# Altium PCB 75200_cap.PcbDoc
Units mm, origin at the board's own origin, x right, y up, seen from the top; angles counter-clockwise.
Board outline 92 x 60 mm, 4 copper layers (Top Layer, Signal Layer 1, Signal Layer 2, Bottom Layer), stack 0.463 mm thick; 12 components, 2 nets, 31 pads, 700 vias.
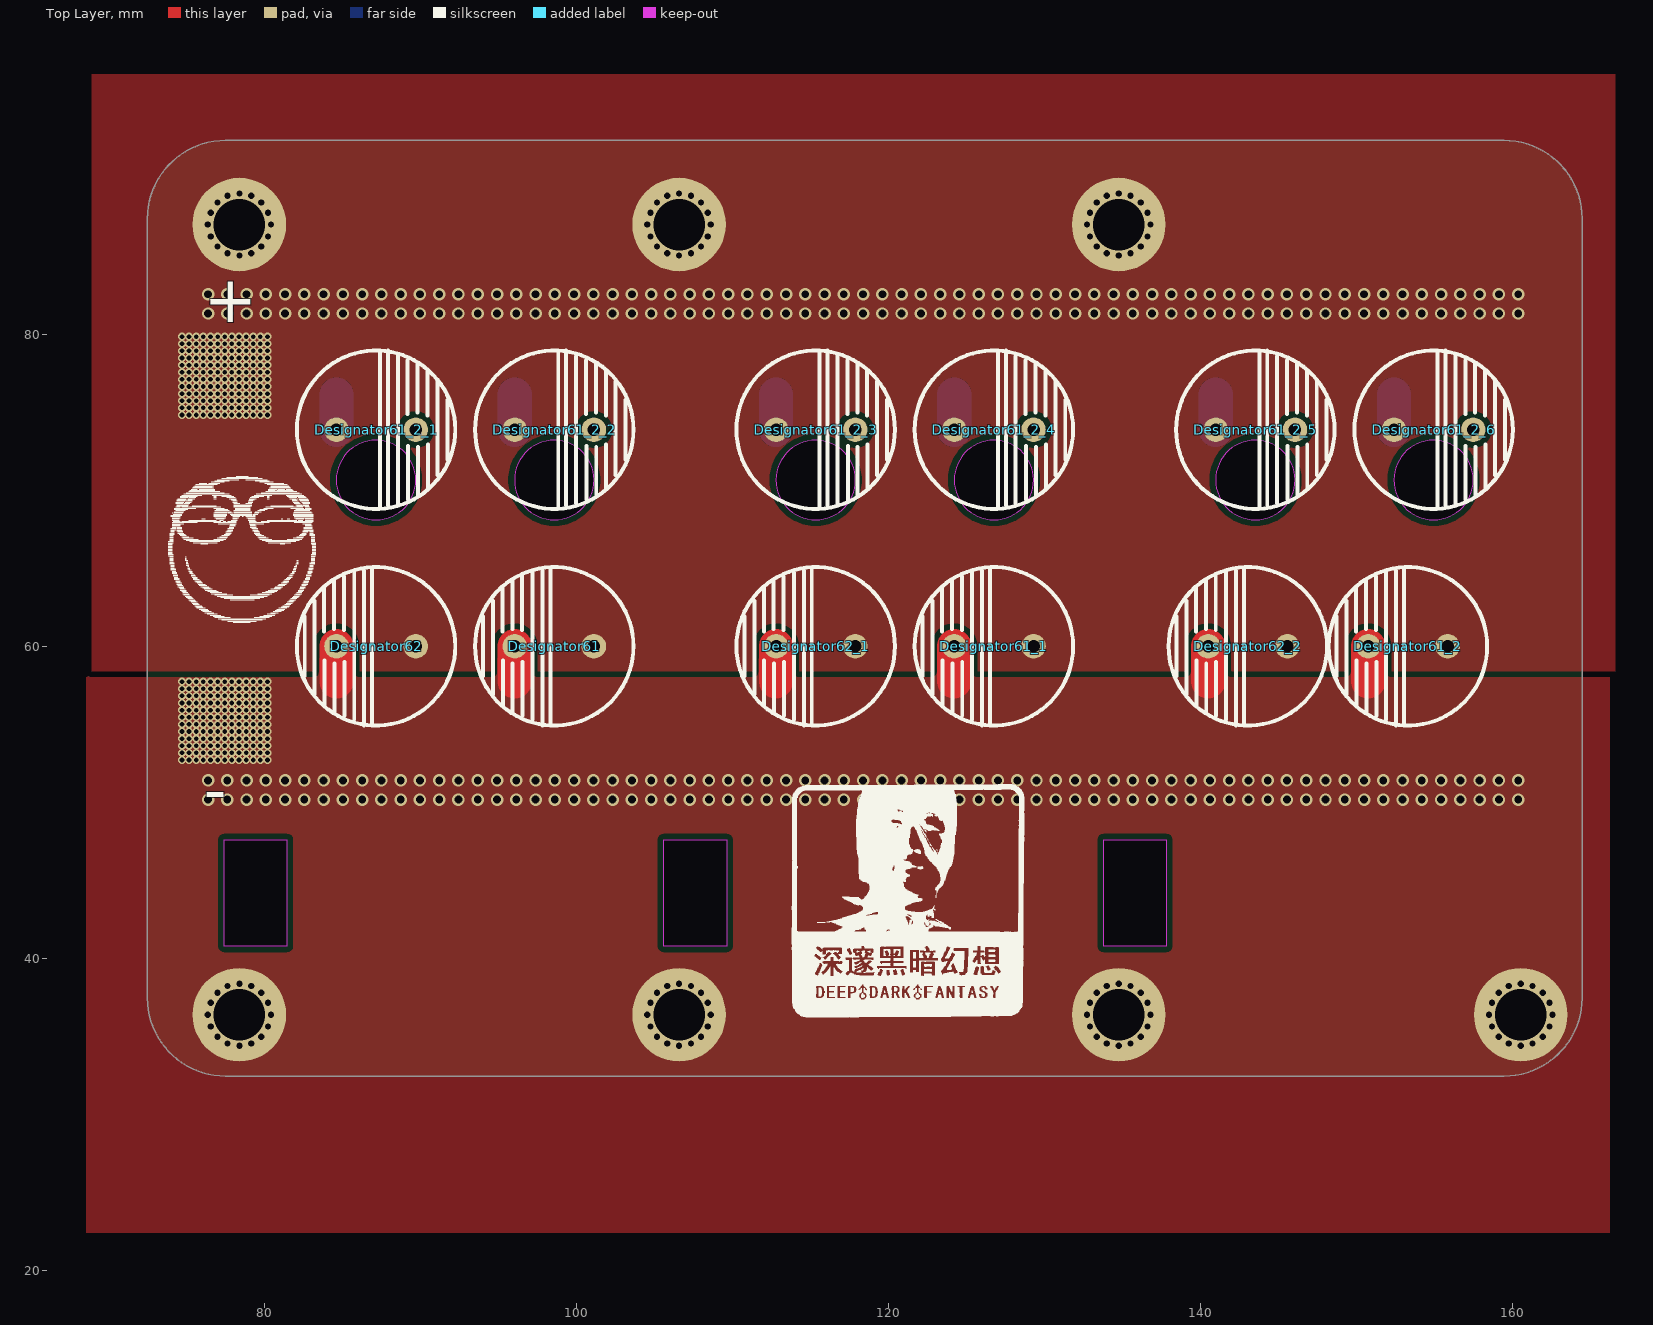
[diagram p0: Top Layer view]
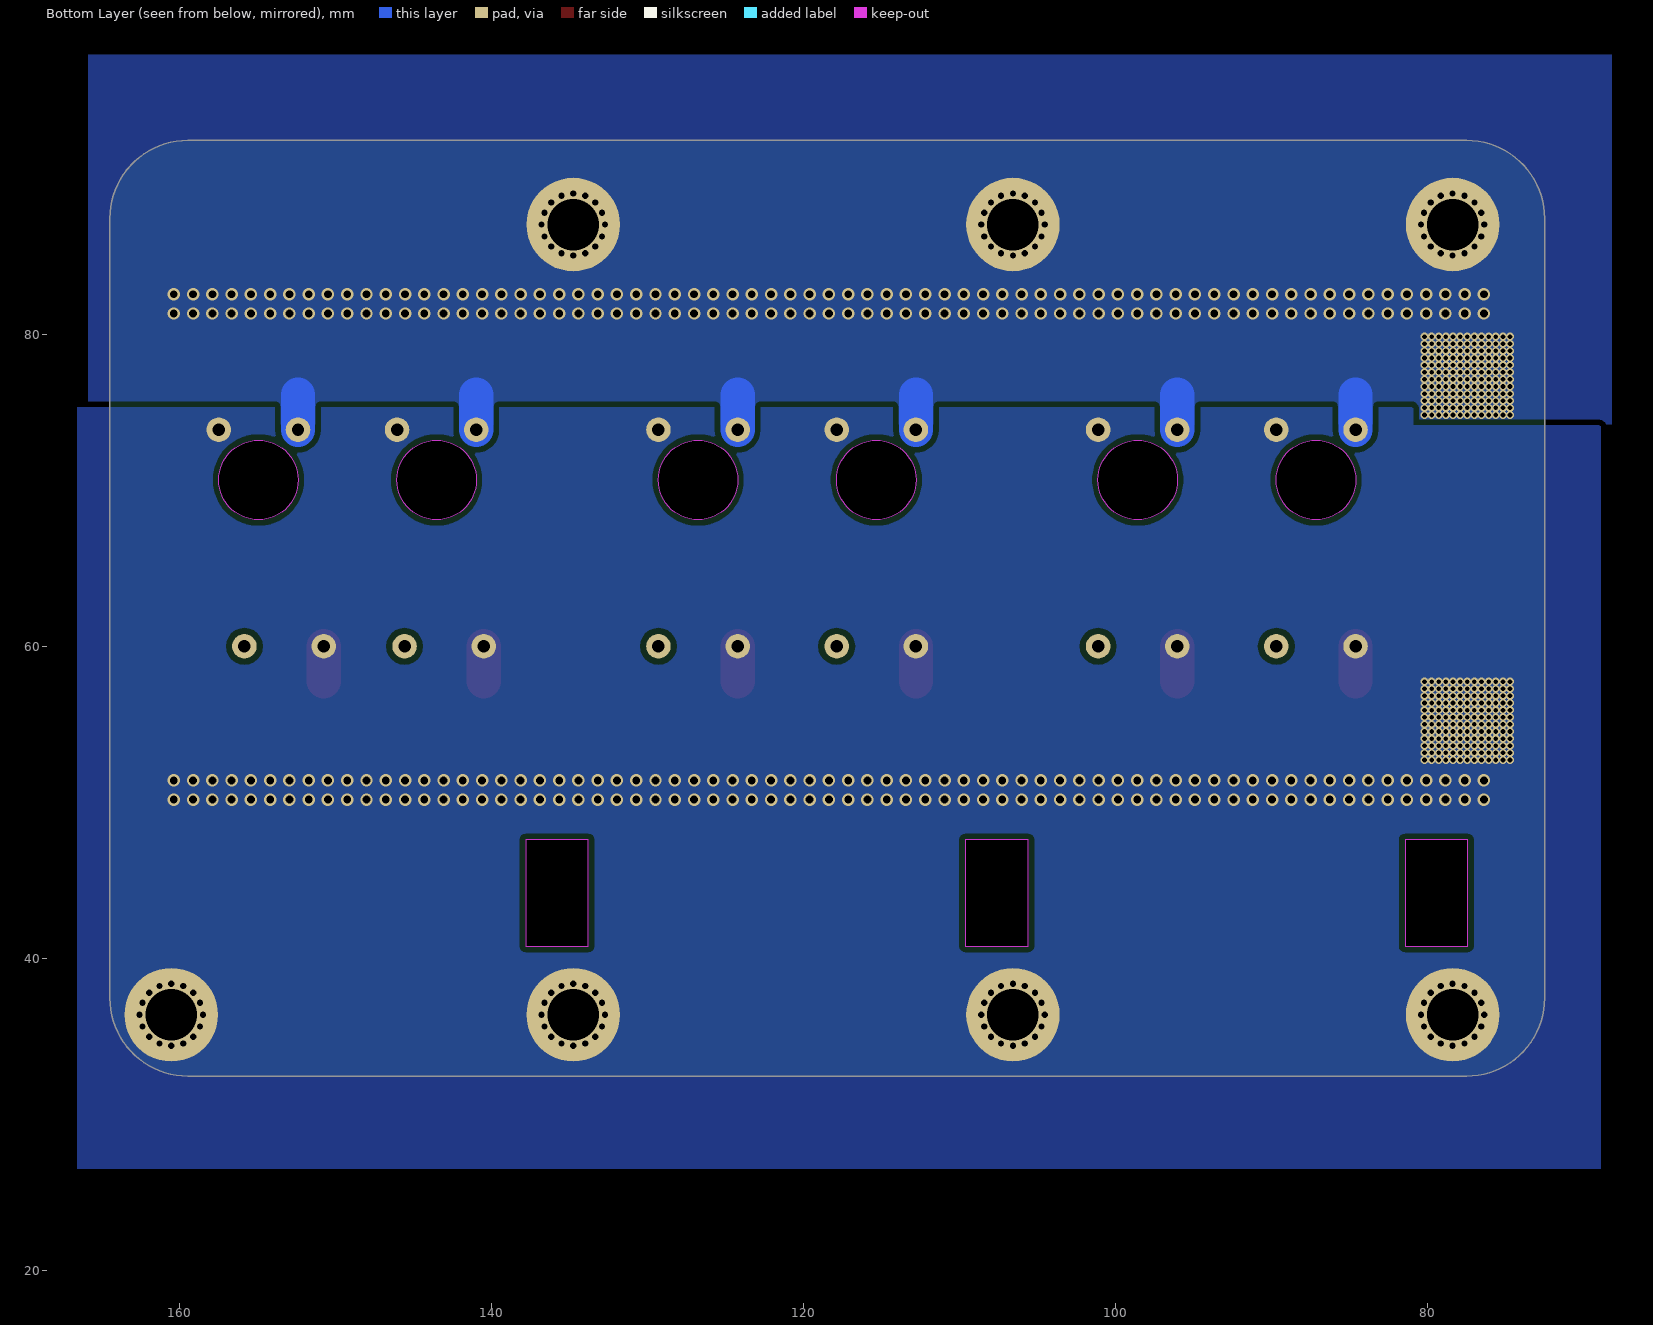
[diagram p1: Bottom Layer view, seen from below]
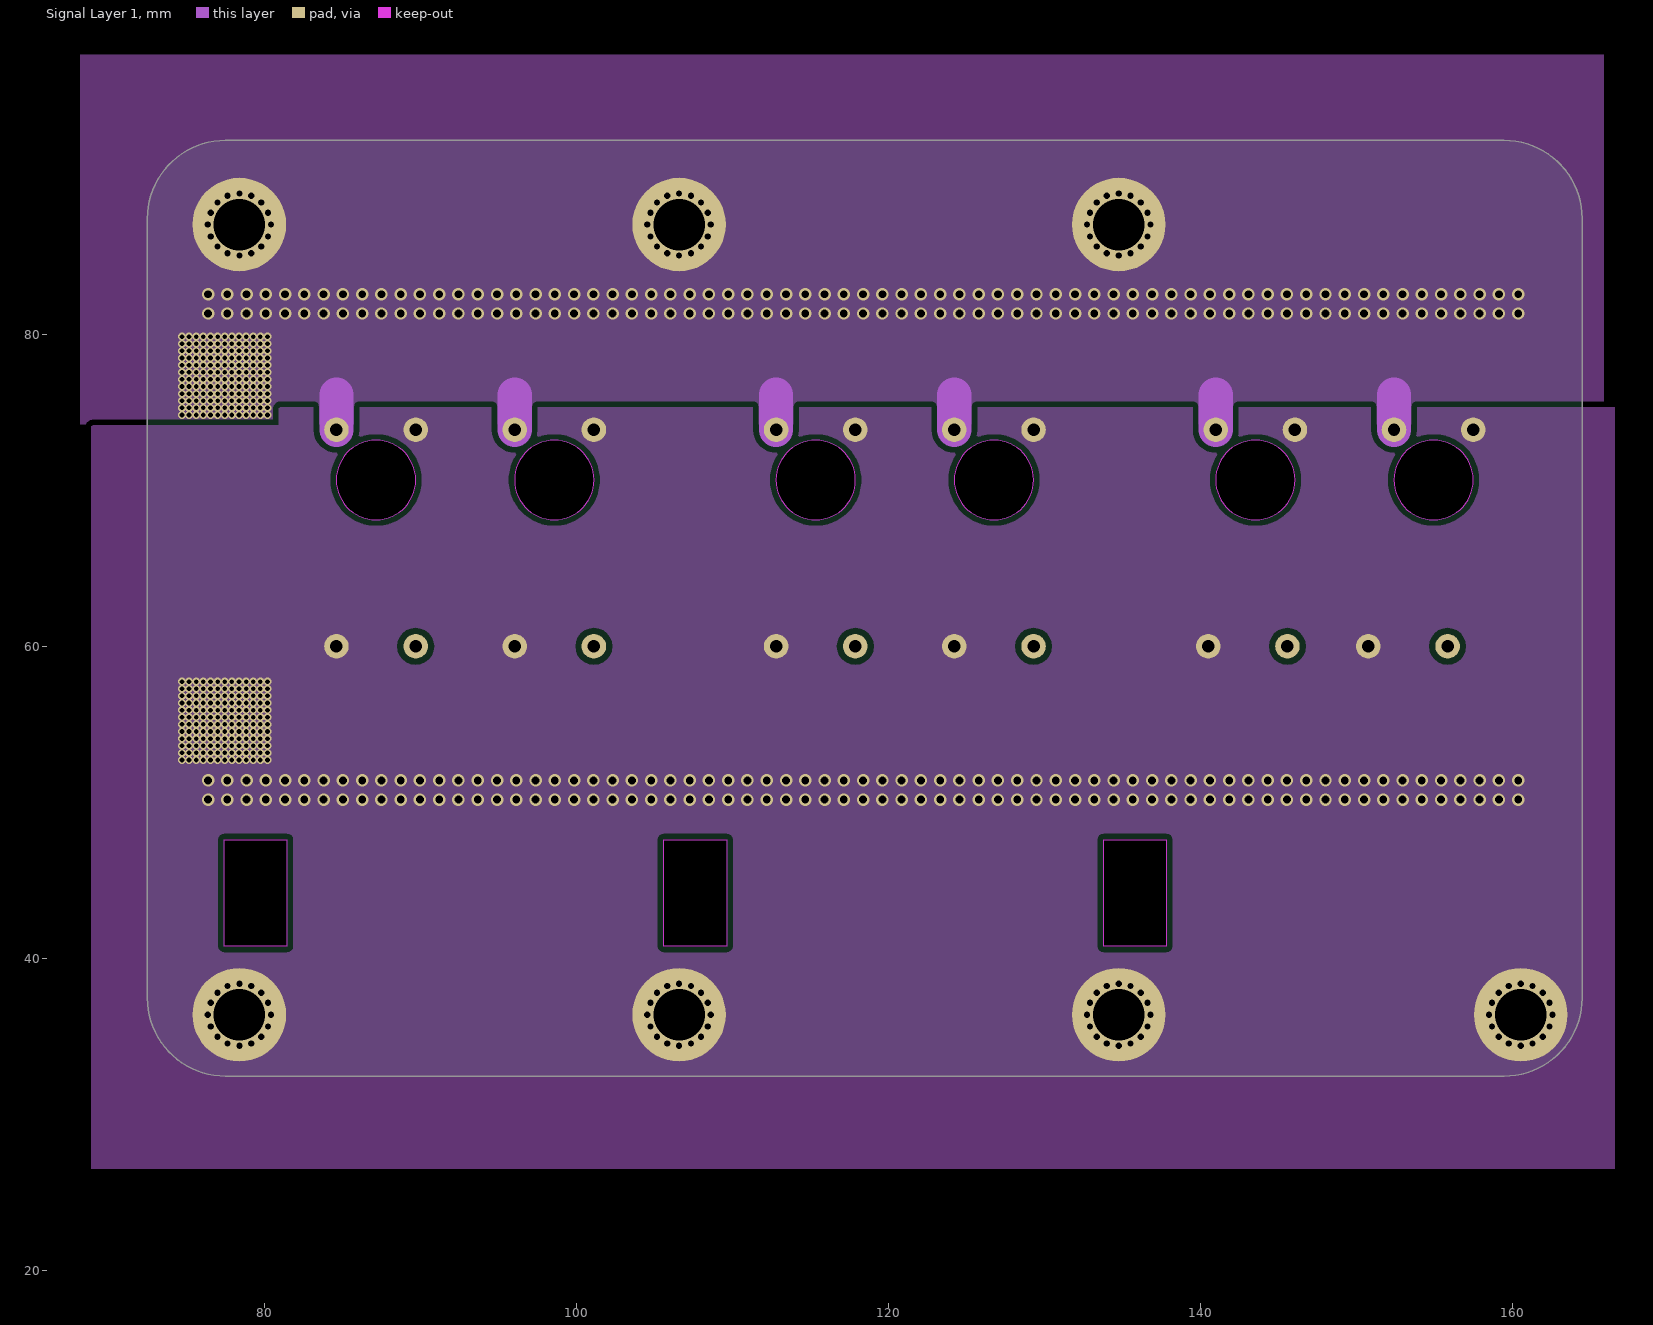
[diagram p2: Signal Layer 1]
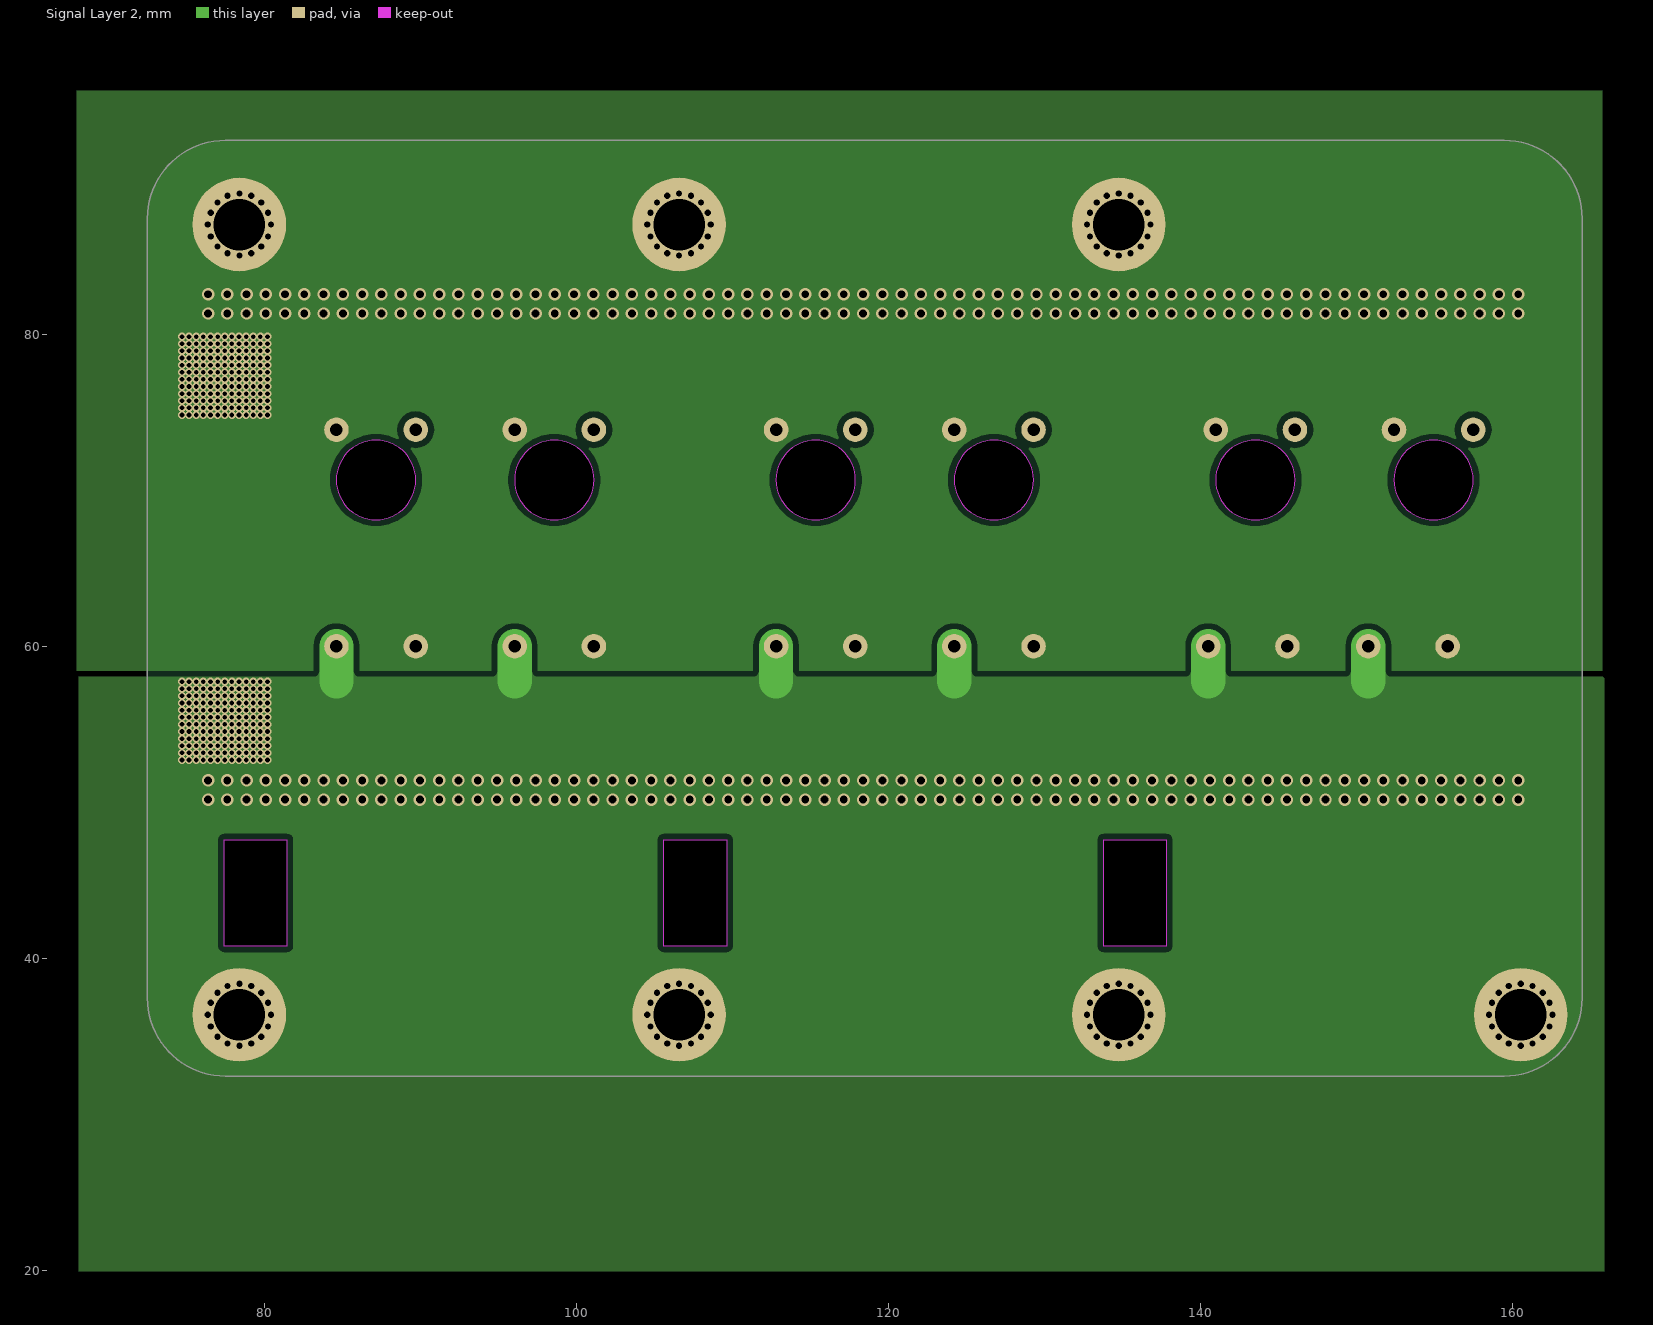
[diagram p3: Signal Layer 2]

## Layer stack, top to bottom
Top Solder: solder mask 0.0102, Solder Resist, Dk 3.5
Top Layer: signal copper 0.0356
Signal Layer 1: signal copper 0.036
Signal Layer 2: signal copper 0.036
Dielectric 1: dielectric 0.32, FR-4, Dk 4.8
Bottom Layer: signal copper 0.0356
Bottom Solder: solder mask 0.0102, Solder Resist, Dk 3.5

## Board outline
72.487,37.461 ccw(c77.487,37.461) 77.487,32.461 159.49,32.461 159.49,32.465 ccw(c159.49,37.465) 164.49,37.465 164.49,87.465 ccw(c159.49,87.465) 159.49,92.465 159.49,92.461 77.485,92.461 77.49,92.466 ccw(c77.49,87.466) 72.49,87.466
cut-out: 152.415,70.688 ccw(c154.965,70.688) 154.965,68.138 ccw(c154.965,70.688) 157.515,70.688 ccw(c154.965,70.688) 154.965,73.238 ccw(c154.965,70.688)
cut-out: 140.985,70.688 ccw(c143.535,70.688) 143.535,68.138 ccw(c143.535,70.688) 146.085,70.688 ccw(c143.535,70.688) 143.535,73.238 ccw(c143.535,70.688)
cut-out: 124.221,70.688 ccw(c126.771,70.688) 126.771,68.138 ccw(c126.771,70.688) 129.321,70.688 ccw(c126.771,70.688) 126.771,73.238 ccw(c126.771,70.688)
cut-out: 112.791,70.688 ccw(c115.341,70.688) 115.341,68.138 ccw(c115.341,70.688) 117.891,70.688 ccw(c115.341,70.688) 115.341,73.238 ccw(c115.341,70.688)
cut-out: 84.597,70.688 ccw(c87.147,70.688) 87.147,68.138 ccw(c87.147,70.688) 89.697,70.688 ccw(c87.147,70.688) 87.147,73.238 ccw(c87.147,70.688)
cut-out: 96.027,70.688 ccw(c98.577,70.688) 98.577,68.138 ccw(c98.577,70.688) 101.127,70.688 ccw(c98.577,70.688) 98.577,73.238 ccw(c98.577,70.688)
cut-out: 77.419,40.792 77.419,47.625 81.432,47.625 81.432,40.792
cut-out: 133.807,40.792 133.807,47.625 137.82,47.625 137.82,40.792
cut-out: 105.613,40.792 105.613,47.625 109.626,47.625 109.626,40.792
cut-out: 0,0 0.254,0 0.254,0.254 0,0.254

## Design rules (kind name [scope] priority, off if disabled: settings)
Clearance [All] p1: gap=0.381 ignorepadtopadclearanceinfootprint=FALSE
PlaneConnect [All] p1: planeconnectstyle=Direct reliefexpansion=0.508 reliefentries=4 reliefconductorwidth=0.254 reliefairgap=0.254
PolygonConnect [All] p1: connectstyle=Direct reliefconductorwidth=0.254 reliefentries=4 polygonreliefangle="90 Angle" airgapwidth=0.254
RoutingVias [All] p1: holewidth=0.711 width=1.27 viastyle="Through Hole" minholewidth=0.711 minwidth=1.27 maxholewidth=0.711 maxwidth=1.27
SolderMaskExpansion [All] p1: expansion=0.102
Width [All] p1: maxlimit=999 minlimit=0.254 preferedwidth=0.254
29 further rules are at their usual default settings.

## Components (designator, comment, footprint, x,y, rotation, side; value= is the part's Value field where it differs from the comment)
Designator61 "Comment" CD10 101.117,60.02 r0 top
Designator61_1 "Comment" CD10 129.311,60.02 r0 top
Designator61_2 "Comment" CD10 155.862,60.02 r0 top
Designator61_2_1 "Comment" CD10 84.607,73.914 r180 top
Designator61_2_2 "Comment" CD10 96.037,73.914 r180 top
Designator61_2_3 "Comment" CD10 112.801,73.914 r180 top
Designator61_2_4 "Comment" CD10 124.231,73.914 r180 top
Designator61_2_5 "Comment" CD10 140.995,73.914 r180 top
Designator61_2_6 "Comment" CD10 152.425,73.914 r180 top
Designator62 "Comment" CD10 89.687,60.02 r0 top
Designator62_1 "Comment" CD10 117.881,60.02 r0 top
Designator62_2 "Comment" CD10 145.593,60.02 r0 top

## Footprints (in the part's own frame and the unit in brackets; to place one, negate y for a bottom-side part, rotate by r counter-clockwise, add the part's x,y. Pads: shape width x height; smd on the part's side, far side on the other; paste and mask are expansions set on the pad)
CD10 [mil]
  round 62 hole 31.5: 1(0,0) 2(-200,0)
  silkscreen extent -300,-200 100,200, body extent -297,-199 97,195, height 575

## Free pads (board coordinates)
  round 6 hole 3.302: 4(78.384,36.398) 4(78.384,87.071) 4(106.578,36.398) 4(106.578,87.071) 4(134.772,36.398) 4(134.772,87.071) 4(160.553,36.398)

## Via types
v1: diameter 0.5, hole 0.3, Top Layer to Bottom Layer, 312 vias
v2: diameter 0.8, hole 0.5, Top Layer to Bottom Layer, 276 vias
v3: diameter 0.5, hole 0.4, Top Layer to Bottom Layer, 112 vias

## Nets (pads, with @x,y where several pads share a name; then routed paths per layer and width w, separated by ;. In a path a pad name is that pad's centre, name@x,y a point inside that pad or via, vN(x,y) a via of type N, cw(c..) or ccw(c..) an arc to the next point about the centre after c; other vN are vias at no path point)
GND: Designator61.2 Designator61_1.2 Designator61_2.2 Designator61_2_1.2 Designator61_2_2.2 Designator61_2_3.2 Designator61_2_4.2 Designator61_2_5.2 Designator61_2_6.2 Designator62.2 Designator62_1.2 Designator62_2.2 pad.4@78.384,36.398 pad.4@106.578,36.398 pad.4@134.772,36.398 pad.4@160.553,36.398 | length 67
  Top Layer w0.254: pad.4@79.984,36.398 ccw(c78.384,36.398) pad.4@79.984,36.398 ; pad.4@108.178,36.398 ccw(c106.578,36.398) pad.4@108.178,36.398 ; pad.4@136.372,36.398 ccw(c134.772,36.398) pad.4@136.372,36.398 ; pad.4@162.153,36.398 ccw(c160.553,36.398) pad.4@162.153,36.398
  Top Layer w2.2: 84.607,57.785 Designator62.2 ; 96.037,57.785 Designator61.2 ; 112.801,57.785 Designator62_1.2 ; 124.231,57.785 Designator61_1.2 ; 140.513,57.785 Designator62_2.2 ; 150.782,57.785 Designator61_2.2
  Signal Layer 2 w2.2: 84.607,57.785 Designator62.2 ; 96.037,57.785 Designator61.2 ; 112.801,57.785 Designator62_1.2 ; 124.231,57.785 Designator61_1.2 ; 140.513,57.785 Designator62_2.2 ; 150.782,57.785 Designator61_2.2
  other v1: 74.701,52.73 75.159,52.73 75.616,52.73 76.073,52.73 76.53,52.73 76.987,52.73 77.445,52.73 77.902,52.73 78.359,52.73 78.816,52.73 79.273,52.73 79.731,52.73 80.188,52.73 74.701,53.188 75.159,53.188 75.616,53.188 76.073,53.188 76.53,53.188 76.987,53.188 77.445,53.188 77.902,53.188 78.359,53.188 78.816,53.188 79.273,53.188 79.731,53.188 80.188,53.188 74.701,53.645 75.159,53.645 75.616,53.645 76.073,53.645 76.53,53.645 76.987,53.645 77.445,53.645 77.902,53.645 78.359,53.645 78.816,53.645 79.273,53.645 79.731,53.645 80.188,53.645 74.701,54.102 75.159,54.102 75.616,54.102 76.073,54.102 76.53,54.102 76.987,54.102 77.445,54.102 77.902,54.102 78.359,54.102 78.816,54.102 79.273,54.102 79.731,54.102 80.188,54.102 74.701,54.559 75.159,54.559 75.616,54.559 76.073,54.559 76.53,54.559 76.987,54.559 77.445,54.559 77.902,54.559 78.359,54.559 78.816,54.559 79.273,54.559 79.731,54.559 80.188,54.559 74.701,55.016 75.159,55.016 75.616,55.016 76.073,55.016 76.53,55.016 76.987,55.016 77.445,55.016 77.902,55.016 78.359,55.016 78.816,55.016 79.273,55.016 79.731,55.016 80.188,55.016 74.701,55.474 75.159,55.474 75.616,55.474 76.073,55.474 76.53,55.474 76.987,55.474 77.445,55.474 77.902,55.474 78.359,55.474 78.816,55.474 79.273,55.474 79.731,55.474 80.188,55.474 74.701,55.931 75.159,55.931 75.616,55.931 76.073,55.931 76.53,55.931 76.987,55.931 77.445,55.931 77.902,55.931 78.359,55.931 78.816,55.931 79.273,55.931 79.731,55.931 80.188,55.931 74.701,56.388 75.159,56.388 75.616,56.388 76.073,56.388 76.53,56.388 76.987,56.388 77.445,56.388 77.902,56.388 78.359,56.388 78.816,56.388 79.273,56.388 79.731,56.388 80.188,56.388 74.701,56.845 75.159,56.845 75.616,56.845 76.073,56.845 76.53,56.845 76.987,56.845 77.445,56.845 77.902,56.845 78.359,56.845 78.816,56.845 79.273,56.845 79.731,56.845 80.188,56.845 74.701,57.302 75.159,57.302 75.616,57.302 76.073,57.302 76.53,57.302 76.987,57.302 77.445,57.302 77.902,57.302 78.359,57.302 78.816,57.302 79.273,57.302 79.731,57.302 80.188,57.302 74.701,57.76 75.159,57.76 75.616,57.76 76.073,57.76 76.53,57.76 76.987,57.76 77.445,57.76 77.902,57.76 78.359,57.76 78.816,57.76 79.273,57.76 79.731,57.76 80.188,57.76
  other v2: 76.372,50.19 77.608,50.19 78.843,50.19 80.079,50.19 81.315,50.19 82.55,50.19 83.786,50.19 85.021,50.19 86.257,50.19 87.492,50.19 88.728,50.19 89.963,50.19 91.199,50.19 92.434,50.19 93.67,50.19 94.905,50.19 96.141,50.19 97.376,50.19 98.612,50.19 99.847,50.19 101.083,50.19 102.319,50.19 103.554,50.19 104.79,50.19 106.025,50.19 107.261,50.19 108.496,50.19 109.732,50.19 110.967,50.19 112.203,50.19 113.438,50.19 114.674,50.19 115.909,50.19 117.145,50.19 118.38,50.19 119.616,50.19 120.851,50.19 122.087,50.19 123.322,50.19 124.558,50.19 125.794,50.19 127.029,50.19 128.265,50.19 129.5,50.19 130.736,50.19 131.971,50.19 133.207,50.19 134.442,50.19 135.678,50.19 136.913,50.19 138.149,50.19 139.384,50.19 140.62,50.19 141.855,50.19 143.091,50.19 144.326,50.19 145.562,50.19 146.797,50.19 148.033,50.19 149.269,50.19 150.504,50.19 151.74,50.19 152.975,50.19 154.211,50.19 155.446,50.19 156.682,50.19 157.917,50.19 159.153,50.19 160.388,50.19 76.372,51.426 77.608,51.426 78.843,51.426 80.079,51.426 81.315,51.426 82.55,51.426 83.786,51.426 85.021,51.426 86.257,51.426 87.492,51.426 88.728,51.426 89.963,51.426 91.199,51.426 92.434,51.426 93.67,51.426 94.905,51.426 96.141,51.426 97.376,51.426 98.612,51.426 99.847,51.426 101.083,51.426 102.319,51.426 103.554,51.426 104.79,51.426 106.025,51.426 107.261,51.426 108.496,51.426 109.732,51.426 110.967,51.426 112.203,51.426 113.438,51.426 114.674,51.426 115.909,51.426 117.145,51.426 118.38,51.426 119.616,51.426 120.851,51.426 122.087,51.426 123.322,51.426 124.558,51.426 125.794,51.426 127.029,51.426 128.265,51.426 129.5,51.426 130.736,51.426 131.971,51.426 133.207,51.426 134.442,51.426 135.678,51.426 136.913,51.426 138.149,51.426 139.384,51.426 140.62,51.426 141.855,51.426 143.091,51.426 144.326,51.426 145.562,51.426 146.797,51.426 148.033,51.426 149.269,51.426 150.504,51.426 151.74,51.426 152.975,51.426 154.211,51.426 155.446,51.426 156.682,51.426 157.917,51.426 159.153,51.426 160.388,51.426
  other v3: 78.384,34.408 106.578,34.408 134.772,34.408 160.553,34.408 77.623,34.559 79.146,34.559 105.817,34.559 107.34,34.559 134.011,34.559 135.534,34.559 159.792,34.559 161.315,34.559 76.977,34.991 79.792,34.991 105.171,34.991 107.986,34.991 133.365,34.991 136.18,34.991 159.146,34.991 161.961,34.991 76.545,35.636 80.223,35.636 104.739,35.636 108.417,35.636 132.933,35.636 136.611,35.636 158.714,35.636 162.392,35.636 76.352,36.398 80.416,36.398 104.546,36.398 108.61,36.398 132.74,36.398 136.804,36.398 158.521,36.398 162.585,36.398 76.545,37.16 80.223,37.16 104.739,37.16 108.417,37.16 132.933,37.16 136.611,37.16 158.714,37.16 162.392,37.16 76.977,37.806 79.792,37.806 105.171,37.806 107.986,37.806 133.365,37.806 136.18,37.806 159.146,37.806 161.961,37.806 77.623,38.237 79.146,38.237 105.817,38.237 107.34,38.237 134.011,38.237 135.534,38.237 159.792,38.237 161.315,38.237 78.384,38.389 106.578,38.389 134.772,38.389 160.553,38.389
VBAT: Designator61.1 Designator61_1.1 Designator61_2.1 Designator61_2_1.1 Designator61_2_2.1 Designator61_2_3.1 Designator61_2_4.1 Designator61_2_5.1 Designator61_2_6.1 Designator62.1 Designator62_1.1 Designator62_2.1 pad.4@78.384,87.071 pad.4@106.578,87.071 pad.4@134.772,87.071 | length 57
  Top Layer w0.254: pad.4@79.984,87.071 ccw(c78.384,87.071) pad.4@79.984,87.071 ; pad.4@108.178,87.071 ccw(c106.578,87.071) pad.4@108.178,87.071 ; pad.4@136.372,87.071 ccw(c134.772,87.071) pad.4@136.372,87.071
  Signal Layer 1 w2.2: Designator61_2_1.1 84.607,76.149 ; Designator61_2_2.1 96.037,76.149 ; Designator61_2_3.1 112.801,76.149 ; Designator61_2_4.1 124.231,76.149 ; Designator61_2_5.1 140.995,76.149 ; Designator61_2_6.1 152.425,76.149
  Bottom Layer w2.2: Designator61_2_1.1 84.607,76.149 ; Designator61_2_2.1 96.037,76.149 ; Designator61_2_3.1 112.801,76.149 ; Designator61_2_4.1 124.231,76.149 ; Designator61_2_5.1 140.995,76.149 ; Designator61_2_6.1 152.425,76.149
  other v1: 74.701,74.854 75.159,74.854 75.616,74.854 76.073,74.854 76.53,74.854 76.987,74.854 77.445,74.854 77.902,74.854 78.359,74.854 78.816,74.854 79.273,74.854 79.731,74.854 80.188,74.854 74.701,75.311 75.159,75.311 75.616,75.311 76.073,75.311 76.53,75.311 76.987,75.311 77.445,75.311 77.902,75.311 78.359,75.311 78.816,75.311 79.273,75.311 79.731,75.311 80.188,75.311 74.701,75.768 75.159,75.768 75.616,75.768 76.073,75.768 76.53,75.768 76.987,75.768 77.445,75.768 77.902,75.768 78.359,75.768 78.816,75.768 79.273,75.768 79.731,75.768 80.188,75.768 74.701,76.225 75.159,76.225 75.616,76.225 76.073,76.225 76.53,76.225 76.987,76.225 77.445,76.225 77.902,76.225 78.359,76.225 78.816,76.225 79.273,76.225 79.731,76.225 80.188,76.225 74.701,76.683 75.159,76.683 75.616,76.683 76.073,76.683 76.53,76.683 76.987,76.683 77.445,76.683 77.902,76.683 78.359,76.683 78.816,76.683 79.273,76.683 79.731,76.683 80.188,76.683 74.701,77.14 75.159,77.14 75.616,77.14 76.073,77.14 76.53,77.14 76.987,77.14 77.445,77.14 77.902,77.14 78.359,77.14 78.816,77.14 79.273,77.14 79.731,77.14 80.188,77.14 74.701,77.597 75.159,77.597 75.616,77.597 76.073,77.597 76.53,77.597 76.987,77.597 77.445,77.597 77.902,77.597 78.359,77.597 78.816,77.597 79.273,77.597 79.731,77.597 80.188,77.597 74.701,78.054 75.159,78.054 75.616,78.054 76.073,78.054 76.53,78.054 76.987,78.054 77.445,78.054 77.902,78.054 78.359,78.054 78.816,78.054 79.273,78.054 79.731,78.054 80.188,78.054 74.701,78.511 75.159,78.511 75.616,78.511 76.073,78.511 76.53,78.511 76.987,78.511 77.445,78.511 77.902,78.511 78.359,78.511 78.816,78.511 79.273,78.511 79.731,78.511 80.188,78.511 74.701,78.969 75.159,78.969 75.616,78.969 76.073,78.969 76.53,78.969 76.987,78.969 77.445,78.969 77.902,78.969 78.359,78.969 78.816,78.969 79.273,78.969 79.731,78.969 80.188,78.969 74.701,79.426 75.159,79.426 75.616,79.426 76.073,79.426 76.53,79.426 76.987,79.426 77.445,79.426 77.902,79.426 78.359,79.426 78.816,79.426 79.273,79.426 79.731,79.426 80.188,79.426 74.701,79.883 75.159,79.883 75.616,79.883 76.073,79.883 76.53,79.883 76.987,79.883 77.445,79.883 77.902,79.883 78.359,79.883 78.816,79.883 79.273,79.883 79.731,79.883 80.188,79.883
  other v2: 76.372,81.365 77.608,81.365 78.843,81.365 80.079,81.365 81.315,81.365 82.55,81.365 83.786,81.365 85.021,81.365 86.257,81.365 87.492,81.365 88.728,81.365 89.963,81.365 91.199,81.365 92.434,81.365 93.67,81.365 94.905,81.365 96.141,81.365 97.376,81.365 98.612,81.365 99.847,81.365 101.083,81.365 102.319,81.365 103.554,81.365 104.79,81.365 106.025,81.365 107.261,81.365 108.496,81.365 109.732,81.365 110.967,81.365 112.203,81.365 113.438,81.365 114.674,81.365 115.909,81.365 117.145,81.365 118.38,81.365 119.616,81.365 120.851,81.365 122.087,81.365 123.322,81.365 124.558,81.365 125.794,81.365 127.029,81.365 128.265,81.365 129.5,81.365 130.736,81.365 131.971,81.365 133.207,81.365 134.442,81.365 135.678,81.365 136.913,81.365 138.149,81.365 139.384,81.365 140.62,81.365 141.855,81.365 143.091,81.365 144.326,81.365 145.562,81.365 146.797,81.365 148.033,81.365 149.269,81.365 150.504,81.365 151.74,81.365 152.975,81.365 154.211,81.365 155.446,81.365 156.682,81.365 157.917,81.365 159.153,81.365 160.388,81.365 76.372,82.601 77.608,82.601 78.843,82.601 80.079,82.601 81.315,82.601 82.55,82.601 83.786,82.601 85.021,82.601 86.257,82.601 87.492,82.601 88.728,82.601 89.963,82.601 91.199,82.601 92.434,82.601 93.67,82.601 94.905,82.601 96.141,82.601 97.376,82.601 98.612,82.601 99.847,82.601 101.083,82.601 102.319,82.601 103.554,82.601 104.79,82.601 106.025,82.601 107.261,82.601 108.496,82.601 109.732,82.601 110.967,82.601 112.203,82.601 113.438,82.601 114.674,82.601 115.909,82.601 117.145,82.601 118.38,82.601 119.616,82.601 120.851,82.601 122.087,82.601 123.322,82.601 124.558,82.601 125.794,82.601 127.029,82.601 128.265,82.601 129.5,82.601 130.736,82.601 131.971,82.601 133.207,82.601 134.442,82.601 135.678,82.601 136.913,82.601 138.149,82.601 139.384,82.601 140.62,82.601 141.855,82.601 143.091,82.601 144.326,82.601 145.562,82.601 146.797,82.601 148.033,82.601 149.269,82.601 150.504,82.601 151.74,82.601 152.975,82.601 154.211,82.601 155.446,82.601 156.682,82.601 157.917,82.601 159.153,82.601 160.388,82.601
  other v3: 78.384,85.081 106.578,85.081 134.772,85.081 77.623,85.232 79.146,85.232 105.817,85.232 107.34,85.232 134.011,85.232 135.534,85.232 76.977,85.664 79.792,85.664 105.171,85.664 107.986,85.664 133.365,85.664 136.18,85.664 76.545,86.309 80.223,86.309 104.739,86.309 108.417,86.309 132.933,86.309 136.611,86.309 76.352,87.071 80.416,87.071 104.546,87.071 108.61,87.071 132.74,87.071 136.804,87.071 76.545,87.833 80.223,87.833 104.739,87.833 108.417,87.833 132.933,87.833 136.611,87.833 76.977,88.479 79.792,88.479 105.171,88.479 107.986,88.479 133.365,88.479 136.18,88.479 77.623,88.91 79.146,88.91 105.817,88.91 107.34,88.91 134.011,88.91 135.534,88.91 78.384,89.062 106.578,89.062 134.772,89.062

## Polygon pours and split planes (outlines as drawn)
GND on Top Layer "Top Layer-VBAT" (solid, pour order 8): 68.58,59.24 166.268,59.24 166.268,22.428 68.58,22.428
VBAT on Top Layer "Top Layer-VBAT" (solid, pour order 0): 68.91,96.723 166.599,96.723 166.599,58.42 68.91,58.42
VBAT on Signal Layer 1 "Top Layer-VBAT" (solid, pour order 10): 68.174,97.942 165.862,97.942 165.862,74.27 68.174,74.27
GND on Signal Layer 1 "Top Layer-VBAT" (solid, pour order 4): 81.001,75.362 80.924,75.286 80.924,74.193 68.986,74.193 68.885,74.244 68.885,26.518 166.573,26.518 166.573,75.362
GND on Signal Layer 2 "Bottom Layer-GND" (solid, pour order 14): 68.097,58.369 165.913,58.369 165.913,19.939 68.097,19.939
VBAT on Signal Layer 2 "Bottom Layer-GND" (solid, pour order 6): 67.97,95.656 165.786,95.656 165.786,58.445 67.97,58.445
no net on Bottom Solder (solid): 76.451,83.388 75.028,81.966 75.028,74.879 80.057,74.879 80.057,83.388
no net on Bottom Solder (solid): 80.057,57.912 80.057,49.352 76.273,49.352 75.028,50.597 75.028,57.912
no net on Bottom Solder (solid): 145.898,63.094
VBAT on Bottom Layer "Top Layer-VBAT" (solid, pour order 18): 68.174,97.942 165.862,97.942 165.862,74.27 68.174,74.27
GND on Bottom Layer "Top Layer-VBAT" (solid, pour order 16): 81.001,75.362 80.924,75.286 80.924,74.193 68.986,74.193 68.885,74.244 68.885,26.518 166.573,26.518 166.573,75.362

## Silkscreen, mask and mechanical layers (free items; w line width, h text height)
Top Overlay:
  drawing of 3302 lines, arcs and shapes, not listed
  text "+" at 76.098,80.797 h3
  text "-" at 76.098,49.378 h3
Bottom Solder:
  rectangle: 78.054,80.527 161.036,83.397
  rectangle: 78.054,49.352 161.036,52.222
Mechanical 1:
  circle w0.254: c154.965,70.688 r2.55
  circle w0.254: c143.535,70.688 r2.55
  circle w0.254: c126.771,70.688 r2.55
  circle w0.254: c115.341,70.688 r2.55
  circle w0.254: c87.147,70.688 r2.55
  circle w0.254: c98.577,70.688 r2.55
  lines w0.254: 72.487,37.461 ccw(c77.487,37.461) 77.487,32.461 159.49,32.461 ; 72.49,37.461 72.49,87.466 cw(c77.49,87.466) 77.49,92.466 77.485,92.461 159.49,92.461 ; 159.49,32.465 ccw(c159.49,37.465) 164.49,37.465 164.49,87.465 ccw(c159.49,87.465) 159.49,92.465 ; 77.419,40.792 77.419,47.625 81.432,47.625 81.432,40.792 77.419,40.792 ; 105.613,40.792 109.626,40.792 109.626,47.625 105.613,47.625 105.613,40.792 ; 133.807,40.792 137.82,40.792 137.82,47.625 133.807,47.625 133.807,40.792